# Altium PCB Controller.PcbDoc
Units mil, origin at the board's own origin, x right, y up, seen from the top; angles counter-clockwise.
Board outline 3475 x 3100 mil, 2 copper layers (Top Layer, Bottom Layer); 108 components, 78 nets, 398 pads, 30 vias.
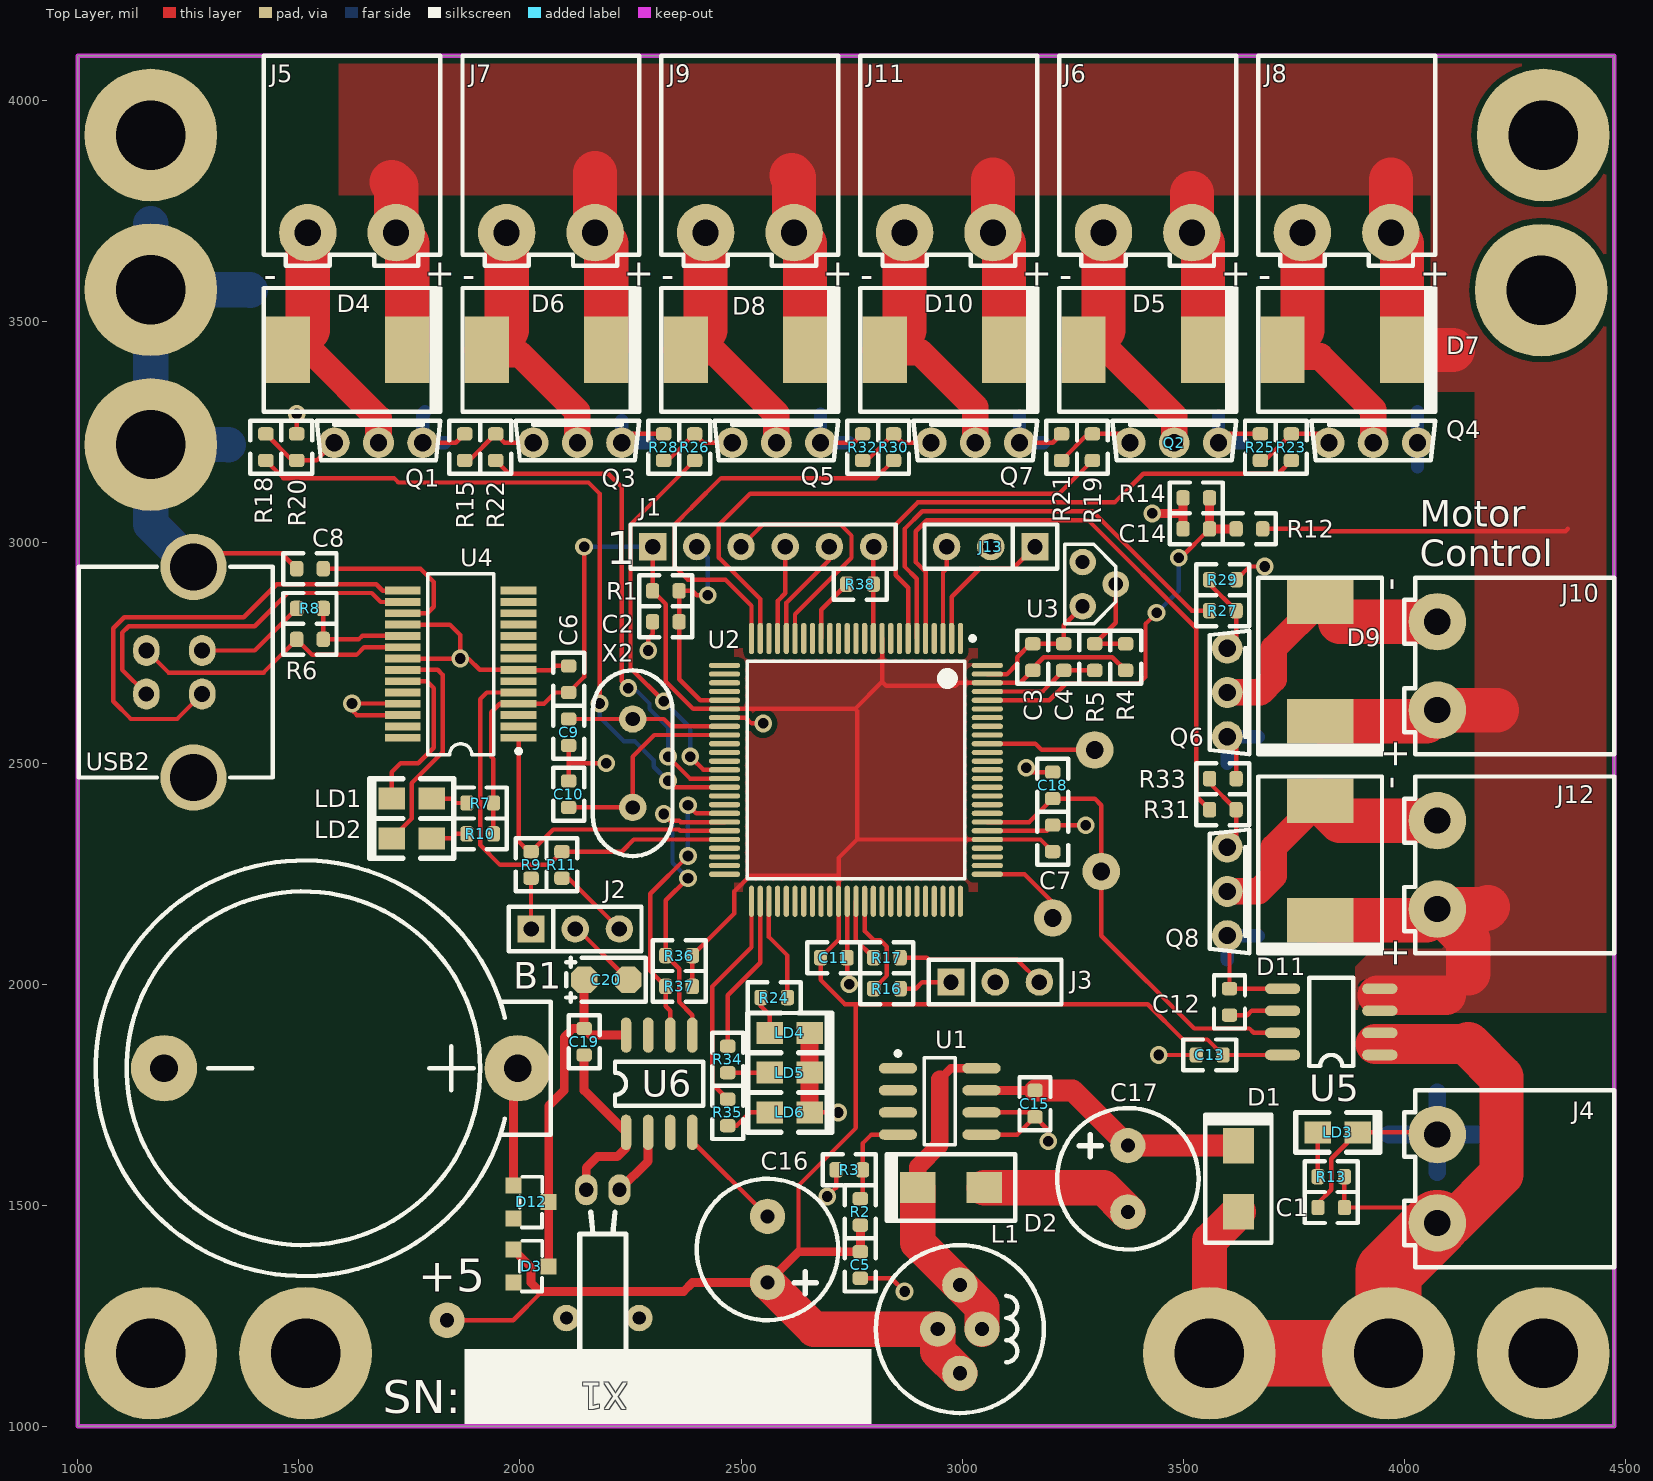
[diagram p0: Top Layer view]
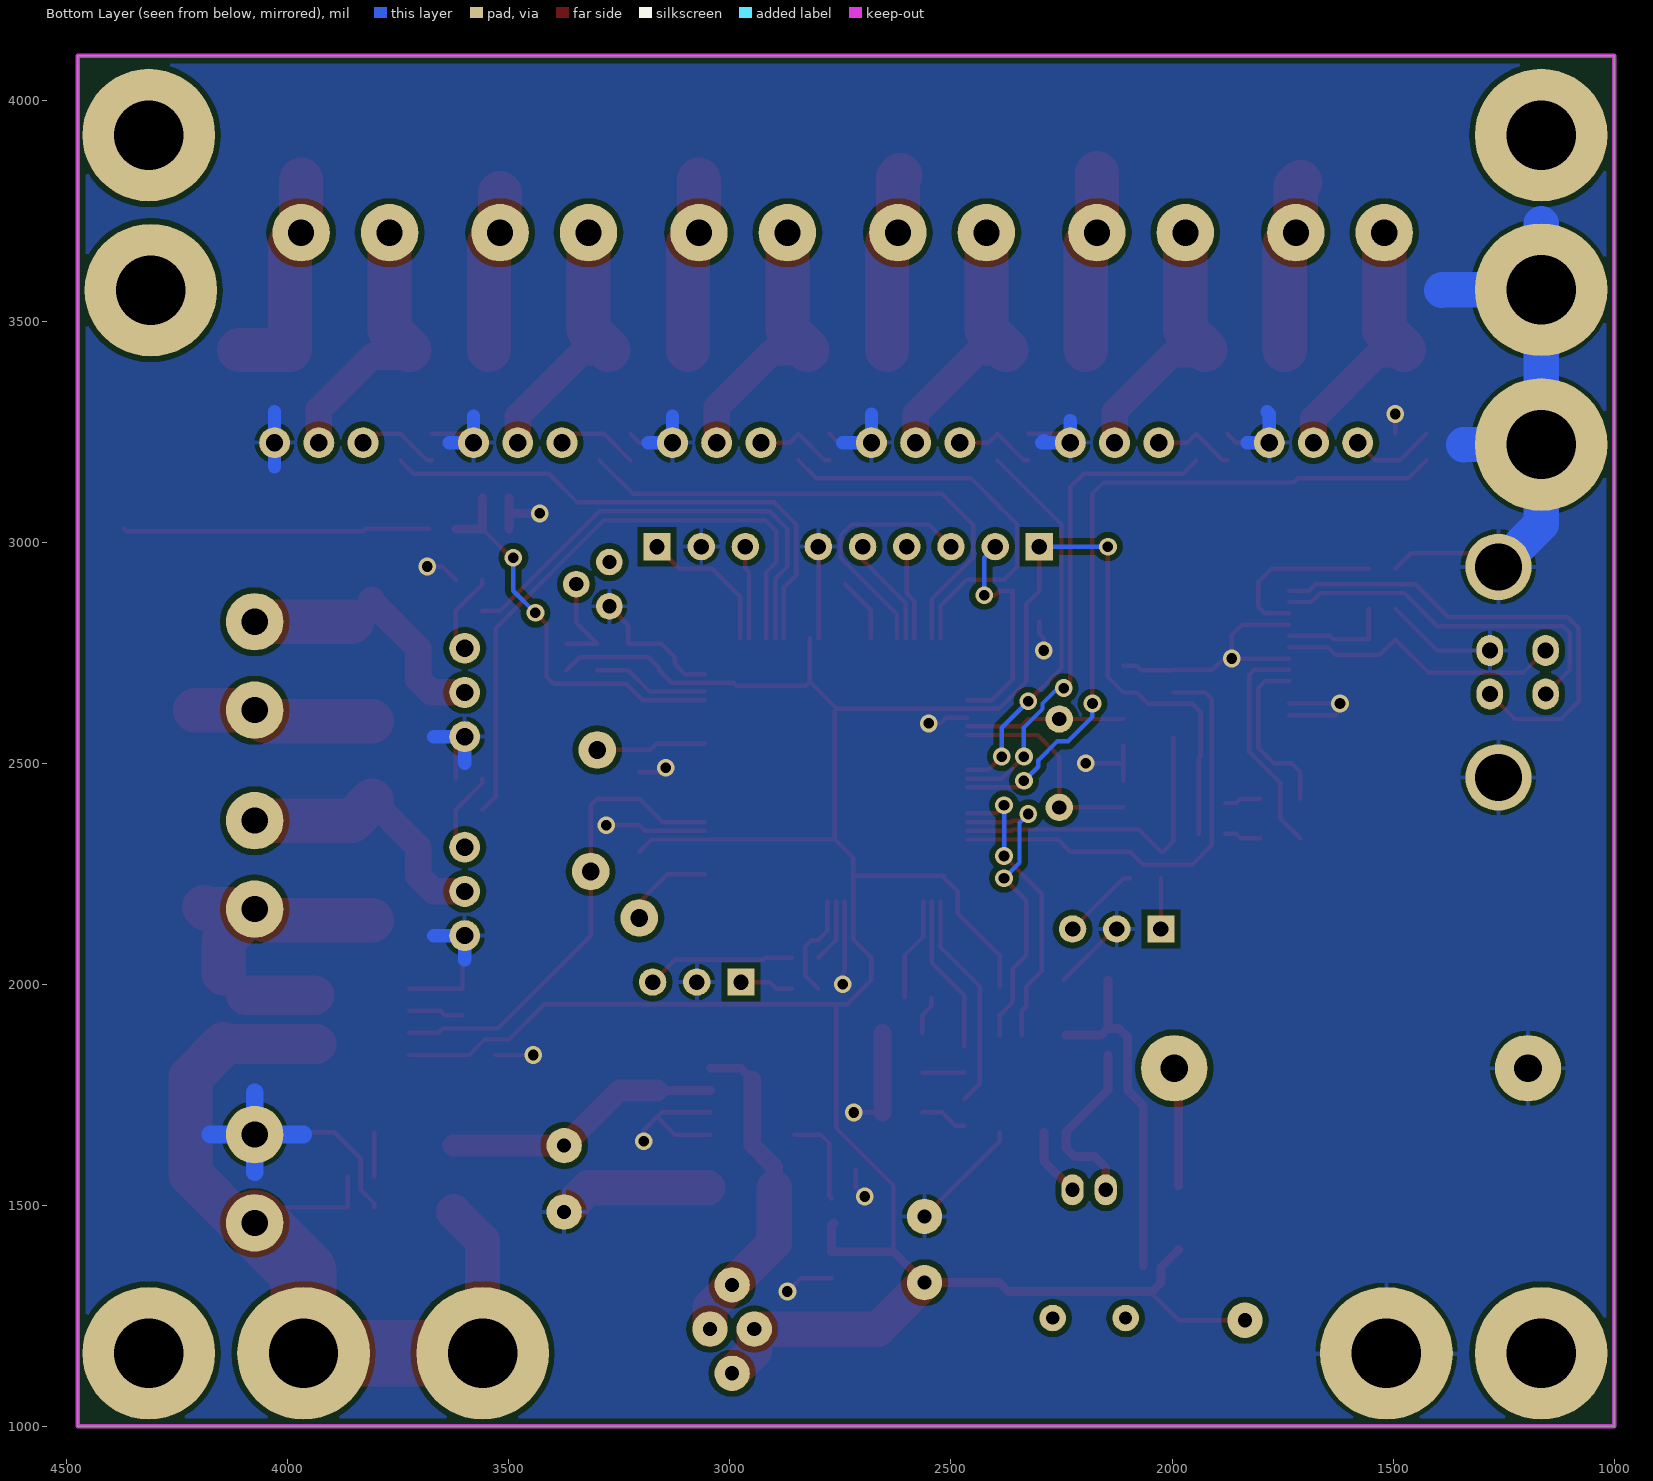
[diagram p1: Bottom Layer view, seen from below]

## Layer stack, top to bottom
Top Layer: signal copper 1.4
Dielectric: dielectric 12.6, FR-4, Dk 4.8
Bottom Layer: signal copper 1.4

## Board outline
1000,1000 1000,4100 4475,4100 4475,1000

## Design rules (kind name [scope] priority, off if disabled: settings)
Clearance Clearance_poly [InPoly] p1: gap=13
Clearance [All] p2: gap=7
ComponentClearance [All] p1 off: gap=10 collisioncheckmode=3 verticalgap=10 showdistances=FALSE
HoleSize [All] p1: absolutevalues=TRUE maxlimit=400 minlimit=24 maxpercent=80.000 minpercent=20.000
MinimumAnnularRing [All] p1: minimumring=8
PlaneClearance [All] p1: clearance=12
PolygonConnect PolygonConnect_via [IsVia] p1: connectstyle=Direct reliefconductorwidth=10 reliefentries=4 polygonreliefangle="90 Angle"
PolygonConnect [All] p2: connectstyle=Relief reliefconductorwidth=10 reliefentries=4 polygonreliefangle="90 Angle"
RoutingVias [All] p1: holewidth=24 width=40 viastyle="Through Hole" minholewidth=24 minwidth=35 maxholewidth=28 maxwidth=50
SolderMaskExpansion [All] p1: expansion=4
TestPointUsage [All] p1: valid=0 allowmultiple=FALSE
Testpoint [(IsPad And (OnTopLayer Or OnBottomLayer))] p1: side=3 testpointundercomponent=TRUE minsize=40 maxsize=100 preferedsize=60 minholesize=0 maxholesize=40 preferedholesize=32 testpointgrid=1 style=297 order=0123456789
Width [All] p1: maxlimit=300 minlimit=10 preferedwidth=10
16 further rules are at their usual default settings.

## Components (designator, comment, footprint, x,y, rotation, side; value= is the part's Value field where it differs from the comment)
B1 "CR2032 3V Lithium" COINBATT6 1995,1810 r180 top
C1 "100nF" 0603 3805,1495 r0 top
C2 "100n" 0603 2300,2820 r0 top
C3 "10n" 0603 3160,2770 r270 top
C4 "100nF" 0603 3230,2710 r90 top
C5 "100n" 0603 2770,1395 r270 top
C6 "100n" 0603 2110,2720 r270 top
C7 "10n" 0603 3205,2360 r270 top
C8 "100n" 0603 1495,2940 r0 top
C9 "22p" 0603 2110,2600 r270 top
C10 "22p" 0603 2110,2400 r90 top
C11 "100n" 0603 2740,2060 r180 top
C12 "100nF" 0603 3605,1990 r270 top
C13 "100nF" 0603 3530,1840 r0 top
C14 "100n" 0603 3500,3030 r0 top
C15 "100nF" 0603 3165,1700 r90 top
C16 "220uF 25V" RB.15/.32 2560,1325 r180 top
C17 "220u 25V" RB.15/.32 3375,1635 r0 top
C18 "100nF" 0603 3205,2480 r270 top
C19 "15p" 0603 2145,1900 r270 top
C20 "10uF 10V Tant" SMD-TANT-A 2145,2010 r0 top
D1 "SS14" DO-214AC 3625,1560 r270 top
D2 "SS14" DO-214AC 2975,1540 r0 top
D3 "BAS16" SOT-23-bat54 1985,1400 r270 top
D4 "SK54C" SMC 1610,3435 r180 top
D5 "SK54C" SMC 3410,3435 r180 top
D6 "SK54C" SMC 2060,3435 r180 top
D7 "SK54C" SMC 3860,3435 r180 top
D8 "SK54C" SMC 2510,3435 r180 top
D9 "SK54C" SMC 3810,2730 r90 top
D10 "SK54C" SMC 2960,3435 r180 top
D11 "SK54C" SMC 3810,2280 r90 top
D12 "BAS16" SOT-23-bat54 1985,1545 r270 top
J1 "Pins 6" SIP6 2300,2990 r0 top
J2 "CON3" SIP3 2025,2125 r0 top
J3 "CON3" SIP3 2975,2005 r0 top
J4 "CON2" WEID2R 4075,1460 r90 top
J5 "CON2" WEID2R 1720,3700 r180 top
J6 "CON2" WEID2R 3520,3700 r180 top
J7 "CON2" WEID2R 2170,3700 r180 top
J8 "CON2" WEID2R 3970,3700 r180 top
J9 "CON2" WEID2R 2620,3700 r180 top
J10 "CON2" WEID2R 4075,2620 r90 top
J11 "CON2" WEID2R 3070,3700 r180 top
J12 "CON2" WEID2R 4075,2170 r90 top
J13 "CON3" SIP3 3165,2990 r180 top
L1 "100uH" INDUCTOR6B 2995,1220 r0 top
LD1 "GRN" 0805DIODE 1710,2420 r0 top
LD2 "YEL" 0805DIODE 1710,2330 r0 top
LD3 "GRN" 0805DIODE 3895,1665 r180 top
LD4 "GRN" 0805DIODE 2655,1890 r180 top
LD5 "GRN" 0805DIODE 2655,1800 r180 top
LD6 "GRN" 0805DIODE 2655,1710 r180 top
Q1 "GK0F2852" TO-251 1780,3225 r0 top
Q2 "GK0F2852" TO-251 3580,3225 r0 top
Q3 "GK0F2852" TO-251 2230,3225 r0 top
Q4 "GK0F2852" TO-251 4030,3225 r0 top
Q5 "GK0F2852" TO-251 2680,3225 r0 top
Q6 "GK0F2852" TO-251 3600,2560 r270 top
Q7 "GK0F2852" TO-251 3130,3225 r0 top
Q8 "GK0F2852" TO-251 3600,2110 r270 top
R1 "100k" 0603 2360,2890 r180 top
R2 "4k7" 0603 2770,1515 r270 top
R3 "1k5" 0603 2715,1580 r0 top
R4 "1k8" 0603 3370,2710 r90 top
R5 "10k" 0603 3300,2710 r90 top
R6 "4k7" 0603 1495,2780 r0 top
R7 "330R" 0603 1940,2410 r180 top
R8 "10k" 0603 1495,2850 r0 top
R9 "1k" 0603 2025,2300 r270 top
R10 "330R" 0603 1940,2340 r180 top
R11 "1k" 0603 2095,2300 r270 top
R12 "3k" 0603 3620,3030 r0 top
R13 "2k7" 0603 3865,1565 r180 top
R14 "1k" 0603 3500,3100 r0 top
R15 "10k" 0603 1875,3185 r90 top
R16 "1k" 0603 2800,1990 r0 top
R17 "1k" 0603 2800,2060 r0 top
R18 "1k" 0603 1425,3185 r90 top
R19 "1k" 0603 3295,3185 r90 top
R20 "10k" 0603 1495,3185 r90 top
R21 "10k" 0603 3225,3185 r90 top
R22 "1k" 0603 1945,3185 r90 top
R23 "1k" 0603 3745,3185 r90 top
R24 "680R" 0603 2605,1970 r180 top
R25 "10k" 0603 3675,3185 r90 top
R26 "1k" 0603 2395,3185 r90 top
R27 "1k" 0603 3560,2845 r0 top
R28 "10k" 0603 2325,3185 r90 top
R29 "10k" 0603 3560,2915 r0 top
R30 "1k" 0603 2845,3185 r90 top
R31 "1k" 0603 3560,2395 r0 top
R32 "10k" 0603 2775,3185 r90 top
R33 "10k" 0603 3560,2465 r0 top
R34 "680R" 0603 2470,1860 r270 top
R35 "680R" 0603 2470,1740 r270 top
R36 "4k7" 0603 2330,2065 r0 top
R37 "4k7" 0603 2330,1995 r0 top
R38 "0R" 0603 2799.37,2905 r180 top
U1 "LM2594M-ADJ" M08A_N 2855,1810 r0 top
U2 "ATMEGA2560-16AU" 100T1_N 2760,2485 r270 top
U3 "LM335Z" TO-92_LM335 3272.71,2855 r90 top
U4 "FT232R" ssop28 1865.91,2723.98 r90 top
U5 "Current Sensor" so-8 3945,1840 r180 top
U6 "PCF8563" so-8 2240,1665 r90 top
USB2 "USB-B" USB_BV 1155,2755 r90 top
X1 "32768Hz" XTAL32K 2225,1535 r180 top
X2 "14.7456MHz" XTAL-V2 2255,2400 r90 top

## Footprints (in the part's own frame and the unit in brackets; to place one, negate y for a bottom-side part, rotate by r counter-clockwise, add the part's x,y. Pads: shape width x height; smd on the part's side, far side on the other; paste and mask are expansions set on the pad)
100T1_N [mm] "100-Pin Thin Quad Flat Pack 0.5 mm Pitch, IPC Medium Density"
  oval 1.8x0.3 smd: 1(-7.55,6) 2(-7.55,5.5) 3(-7.55,5) 4(-7.55,4.5) 5(-7.55,4) 6(-7.55,3.5) 7(-7.55,3) 8(-7.55,2.5) 9(-7.55,2) 10(-7.55,1.5) 11(-7.55,1) 12(-7.55,0.5) 13(-7.55,0) 14(-7.55,-0.5) 15(-7.55,-1) 16(-7.55,-1.5) 17(-7.55,-2) 18(-7.55,-2.5) 19(-7.55,-3) 20(-7.55,-3.5) 21(-7.55,-4) 22(-7.55,-4.5) 23(-7.55,-5) 24(-7.55,-5.5) 25(-7.55,-6) 51(7.55,-6) 52(7.55,-5.5) 53(7.55,-5) 54(7.55,-4.5) 55(7.55,-4) 56(7.55,-3.5) 57(7.55,-3) 58(7.55,-2.5) 59(7.55,-2) 60(7.55,-1.5) 61(7.55,-1) 62(7.55,-0.5) 63(7.55,0) 64(7.55,0.5) 65(7.55,1) 66(7.55,1.5) 67(7.55,2) 68(7.55,2.5) 69(7.55,3) 70(7.55,3.5) 71(7.55,4) 72(7.55,4.5) 73(7.55,5) 74(7.55,5.5) 75(7.55,6)
  oval 0.3x1.8 smd: 26(-6,-7.55) 27(-5.5,-7.55) 28(-5,-7.55) 29(-4.5,-7.55) 30(-4,-7.55) 31(-3.5,-7.55) 32(-3,-7.55) 33(-2.5,-7.55) 34(-2,-7.55) 35(-1.5,-7.55) 36(-1,-7.55) 37(-0.5,-7.55) 38(0,-7.55) 39(0.5,-7.55) 40(1,-7.55) 41(1.5,-7.55) 42(2,-7.55) 43(2.5,-7.55) 44(3,-7.55) 45(3.5,-7.55) 46(4,-7.55) 47(4.5,-7.55) 48(5,-7.55) 49(5.5,-7.55) 50(6,-7.55) 76(6,7.55) 77(5.5,7.55) 78(5,7.55) 79(4.5,7.55) 80(4,7.55) 81(3.5,7.55) 82(3,7.55) 83(2.5,7.55) 84(2,7.55) 85(1.5,7.55) 86(1,7.55) 87(0.5,7.55) 88(0,7.55) 89(-0.5,7.55) 90(-1,7.55) 91(-1.5,7.55) 92(-2,7.55) 93(-2.5,7.55) 94(-3,7.55) 95(-3.5,7.55) 96(-4,7.55) 97(-4.5,7.55) 98(-5,7.55) 99(-5.5,7.55) 100(-6,7.55)
  silkscreen extent -7.67,-6.25 6.25,6.83, body extent -7,-7 7,7, height 1.05
0603 [mil]
  rrect50% 30x35 smd: 1(0,0) 2(60,0)
  silkscreen extent -30,-35 90,35
0805DIODE [mil]
  rect 60x50 smd: A(90,0) K(0,0)
  silkscreen extent -50,-45 140,45
COINBATT6 [mil]
  round 150 hole 63: +(0,0) -(800,0)
  silkscreen extent -75,-470 955,470
DO-214AC [mil]
  rect 80x70 smd: A(75,0) K(-75,0)
  silkscreen extent -145,-75 145,75
INDUCTOR6B [mil] "380mil dia"
  round 80 hole 32: 1(0,100) 1(50,0) 2(-50,0) 2(0,-100)
  silkscreen extent -190,-190 190,190
M08A_N [mm]
  oval 2.2x0.6 smd: 1(0,0) 2(0,-1.27) 3(0,-2.54) 4(0,-3.81) 5(4.8,-3.81) 6(4.8,-2.54) 7(4.8,-1.27) 8(4.8,0)
  silkscreen extent -0.12,-4.41 3.3,0.97, body extent 0.45,-4.36 4.35,0.54, height 1.76
RB.15/.32 [mil]
  round 80 hole 32: 1(0,0) 2(0,-150)
  silkscreen extent -160,-235 160,85
SIP3 [mil]
  rect 62x62 hole 35: 1(0,0)
  round 62 hole 35: 2(100,0) 3(200,0)
  silkscreen extent -50,-50 250,50
SIP6 [mil]
  rect 62x62 hole 35: 1(0,0)
  round 62 hole 35: 2(100,0) 3(200,0) 4(300,0) 5(400,0) 6(500,0)
  silkscreen extent -50,-50 550,50
SMC [mil]
  rect 100x150 smd: A(135,0) K(-135,0)
  silkscreen extent -210,-140 190,140
SMD-TANT-A [mil]
  oct 60x60 smd: 1(0,0) 2(100,0)
  silkscreen extent -40,-50 140,50
so-8 [mil]
  oval 80x24 smd: 1(0,0) 2(0,-50) 3(0,-100) 4(0,-150) 5(220,-150) 6(220,-100) 7(220,-50) 8(220,0)
  silkscreen extent 60,-175 160,25
SOT-23-bat54 [mil]
  rect 36x36 smd: A(0,0) K(38,80) NC(75,0)
  silkscreen extent -20,15 95,65
ssop28 [mm] "SSOP; 28 Leads; Body Width 5.3 mm; Pitch 0.65 mm"
  rect 0.45x2.05 smd: 1(-4.225,-3.325) 2(-3.575,-3.325) 3(-2.925,-3.325) 4(-2.275,-3.325) 5(-1.625,-3.325) 6(-0.975,-3.325) 7(-0.325,-3.325) 8(0.325,-3.325) 9(0.975,-3.325) 10(1.625,-3.325) 11(2.275,-3.325) 12(2.925,-3.325) 13(3.575,-3.325) 14(4.225,-3.325) 15(4.225,3.325) 16(3.575,3.325) 17(2.925,3.325) 18(2.275,3.325) 19(1.625,3.325) 20(0.975,3.325) 21(0.325,3.325) 22(-0.325,3.325) 23(-0.975,3.325) 24(-1.625,3.325) 25(-2.275,3.325) 26(-2.925,3.325) 27(-3.575,3.325) 28(-4.225,3.325)
  silkscreen extent -5.2,-3.45 5.2,1.9
TO-92_LM335 [mil]
  round 60 hole 32: +(50,-75) -(0,0) ADJ(100,0)
  silkscreen extent -40,-75 140,40
TO-251 [mil]
  round 70 hole 39: D(-100,0) G(-200,0) S(0,0)
  silkscreen extent -240,-40 40,50
USB_BV [mm] "USB Type B vertical"
  round 3.81 hole 2.71: 0(-7.3,-2.71) 0(4.8,-2.71)
  oval 1.778x1.524 hole 0.92: 1(0,0) 3(-2.5,-3.2) 4(0,-3.2)
  oval 1.778x1.524 hole 0.889: 2(-2.5,0)
  silkscreen extent -7.3,-7.26 4.82,3.89
WEID2R [mil]
  round 130 hole 59: 1(0,0) 2(200,0)
  silkscreen extent -100,-400 300,75
XTAL32K [mil]
  oval 50x70 hole 32: 1(0,0) 2(75,0)
  silkscreen extent -15,50 90,400
XTAL-V2 [mil]
  round 62 hole 32: 1(0,0) 2(200,0)
  silkscreen extent -110,-90 310,90

## Part data
B1: library part BATTERY
C1 C3 C4 C6 C7 C8 C9 C10 C11 C12 C13 C14 C15 C18 C19: library part CAP
C2 C5: library part cap
C16 C17 C20: library part "CAPACITOR POL-S"
D1 D2: library part "DIODE SCHOTTKY-S"
D3 D12: library part DIODE
D4 D5 D6 D7 D8 D9 D10 D11: library part "DIODE SCHOTTKY"
J1: library part CON6
L1: library part INDUCTOR6
LD1 LD2 LD3 LD4 LD5 LD6: library part LED
Q1 Q2 Q3 Q4 Q5 Q6 Q7 Q8: library part MOSFET-N1DSML
R1 R9 R11 R16 R17: library part res8
R2 R3: library part RES-AX0.3
R4 R5 R6 R7 R8 R10 R12 R13 R14 R15 R18 R19 R20 R21 R22 R23 R24 R25 R26 R27 R28 R29 R30 R31 R32 R33 R34 R35 R36 R37 R38: library part RES8
U1: library part LM2594
U2: library part ATMEGA2560(TQFP100)
U5: library part ACS754
X1 X2: library part CRYSTAL

## Free pads (board coordinates)
  round 60 hole 30: 0(2105,1245) 0(2270,1245)
  round 85 hole 40: 0(3300,2530) 1(3205,2150) 1(3315,2255)
  round 80 hole 32: 2(1835,1240)
  round 300 hole 157 paste+0: ""(1165,1165) ""(1165,3220.91) ""(1165,3570.91) ""(1165,3920.91) ""(1515,1165) ""(3559.61,1165) ""(3964.61,1165) ""(4310,3570) ""(4314.61,1165) ""(4314.61,3920.91)

## Via types
v1: diameter 40, hole 24, Top Layer to Bottom Layer, tented both sides, 30 vias

## Nets (pads, with @x,y where several pads share a name; then routed paths per layer and width w, separated by ;. In a path a pad name is that pad's centre, name@x,y a point inside that pad or via, vN(x,y) a via of type N, cw(c..) or ccw(c..) an arc to the next point about the centre after c; other vN are vias at no path point)
12V: C1.2 D1.A J4.1 pad.@3559.61,1165 pad.@3964.61,1165 R13.1 U5.1 U5.2 | length 2113.9
  Top Layer w10: R13.1 C1.2 4040,1495 J4.1
  Top Layer w80: pad.@3559.61,1165 3559.61,1419.61 D1.A ; J4.1 J4.1@4110,1460
  Top Layer w90: 3935,1865 4145,1865
  Top Layer w100: J4.1@4110,1460 4220,1570 4220,1790 4145,1865
  Top Layer w150: pad.@3559.61,1165 3964.61,1165 3964.61,1349.61 J4.1
12V_MOTOR: D4.K D5.K D6.K D7.K D8.K D9.K D10.K D11.K J5.1 J6.1 J7.1 J8.1 J9.1 J10.1 J11.1 J12.1 R12.2 U5.3 U5.4 | length 4309.3
  Top Layer w10: R12.2 3825,3030 3830,3025 4365,3025 4370,3030
  Top Layer w90: 3940,1975 4095,1975
  Top Layer w100: 1710,3815 1720,3805 J5.1 1745,3675 D4.K ; 2170,3835 J7.1 2195,3675 D6.K ; 2615,3830 2620,3825 J9.1 2645,3675 D8.K ; 3070,3820 J11.1 3095,3675 D10.K ; 3520,3790 J6.1 3545,3675 D5.K ; D11.K 4050,2145 J12.1 ; D9.K 4050,2595 J10.1 4210,2620 ; 3970,3820 J8.1 3995,3675 D7.K 4110,3435 ; 4145,2025 4145,2100 J12.1 ; 4190,2175 4185,2170 J12.1
12V_OUT_MON: C14.2 R12.1 R14.2 U2.96 | length 907.5
  Top Layer w10: U2.96 3197.48,2642.48 3235,2680 3400,2680 3415,2695 3415,2815 v1(3440,2840) ; v1(3490,2965) 3495,2965 C14.2
  Top Layer w20: R14.2 C14.2 R12.1
  Bottom Layer w10: v1(3440,2840) 3490,2890 v1(3490,2965)
+5: C3.2 C5.1 C6.2 C7.2 C11.2 C13.2 C16.1 D3.A J1.1 L1.2 pad.2 R1.2 R2.2 R4.1 R7.1 R10.1 R36.2 R37.2 U2.10 U2.31 U2.61 U2.80 U2.98 U2.100 U4.4 U5.8 | length 7604.9
  Top Layer w10: pad.2 1985,1240 2050,1305 ; R10.1 R7.1 1940,2510 1935,2515 1935,2615 1954.41,2634.41 U4.4 2054.41,2634.41 2080,2660 C6.2 2145,2695 2145,2730 v1(2145,2990) ; J1.1 R1.2 2330,2860 2330,2685 2392.2,2622.8 U2.31 2757.8,2622.8 ; R37.2 R36.2 2485,2160 2485,2210 2520,2245 ; 2515,2245 2520,2245 ; 2630,1395 2630,1545 2760,1675 2760,1955 ; U2.10 2819.06,2684.06 ; C7.2 3177.48,2327.52 U2.80 2762.52,2327.52 ; R4.1 3340,2740 3185,2740 3160,2715 C3.2 3131.85,2681.85 U2.98 2991.85,2681.85 2985,2675 2828.11,2675 2819.06,2684.06 ; U5.8 C13.2 3555,1875 3500,1875 3420,1955 2760,1955 ; 2520,2245 2720.63,2245 ; 2720.63,2245 2720.63,2285.63 2762.52,2327.52 ; 2720.63,2245 U2.61 2720.63,2100.63 C11.2 2680,2010 2735,1955 2760,1955 ; 2757.8,2622.8 2762.52,2618.07 2762.52,2327.52 ; 2757.8,2622.8 2819.06,2684.06
  Top Layer w20: D3.A 2025,1360 2025,1325 2045,1305 2050,1305 2370,1305 2390,1325 C16.1 2630,1395 C5.1 R2.2 R2.2@2765,1460
  Top Layer w80: C16.1 2665,1220 2945,1220 2945,1170 L1.2@2995,1120
  Bottom Layer w10: v1(2145,2990) J1.1
+VBB: C19.1 C20.1 D3.K D12.K U6.8 | length 792
  Top Layer w20: D3.K D12.K 2065,1725 2100,1760 2100,1880 2120,1900 C19.1@2140,1900 ; C20.1 C19.1 2160,1885 U6.8
BOARD_ID: R38.2 U2.17 | length 146.8
  Top Layer w10: U2.17 2681.26,2846.89 R38.2
CS0: U2.19
GND: B1.- C1.1 C2.1 C3.1 C4.2 C5.2 C6.1 C7.1 C8.1 C9.2 C10.2 C11.1 C12.1 C13.1 C14.1 C15.1 C16.2 C17.2 C18.1 C20.2 D2.A J1.6 J2.2 J3.2 J4.2 J13.2 LD3.K LD4.K LD5.K LD6.K pad.@1165,3220.91 pad.@1165,3570.91 pad.@1515,1165 Q1.S Q2.S Q3.S Q4.S Q5.S Q6.S Q7.S Q8.S R3.1 R8.1 R14.1 R15.2 R20.2 R21.2 R25.2 R28.2 R29.2 R32.2 R33.2 R38.1 U1.5 U1.6 U2.11 U2.32 U2.62 U2.81 U2.99 U3.- U4.7 U4.18 U4.21 U4.25 U4.26 U5.5 U6.4 USB2.0 USB2.4 | length 8412.9
  Top Layer w10: USB2.0@1261.69,2943.98 1292.72,2975 1460,2975 C8.1 ; USB2.4 1400,2755 R8.1 ; R20.2 v1(1495,3290) ; U4.26 1631.18,2608.82 1620,2620 v1(1620,2635) 1734.41,2635 U4.25 ; U4.21 v1(1865,2736.77) ; U4.18 1841.46,2813.54 1865,2790 v1(1865,2736.77) ; Q1.S 1855,3225 R15.2 ; C10.2 2110,2500 ; C9.2 2110,2500 ; C6.1 2080,2720 2070,2710 1997.99,2710 U4.7 1908.82,2711.18 1883.23,2736.77 v1(1865,2736.77) ; J2.2 2130,2125 C20.2 ; v1(2195,2500) 2110,2500 ; Q3.S 2250,3245 R28.2 ; v1(2290,2755) 2290,2782.5 2300,2792.5 C2.1 ; U6.4 2390,1645 C16.2 ; U2.32 2510.83,2603.11 2523.94,2590 v1(2550,2590) ; LD6.K v1(2720,1710) ; Q5.S 2755,3225 R32.2 ; v1(2695,1520) 2715,1540 R3.1 ; U2.62 2740,2187.44 C11.1 2740,2030 2745,2025 v1(2745,2000) ; C5.2 2840,1335 v1(2870,1305) ; U2.11 2799.37,2989.37 J1.6 ; U1.5 3125,1660 C15.1 ; U1.6 3155,1710 C15.1 ; U2.81 3192.2,2347.2 C7.1 v1(3280,2360) ; U2.99 3101.54,2701.54 3125,2725 3125,2740 3155,2770 C3.1 C4.2 3230,2812.29 U3.- ; Q7.S 3205,3225 R21.2 ; v1@3140,2490 v1(3145,2490) 3155,2480 C18.1 ; v1(3195,1645) 3195,1670 C15.1 ; v1(3445,1840) C13.1 ; Q2.S 3600,3245 R25.2 ; Q8.S 3605,2105 C12.1 U5.5 ; Q6.S 3620,2540 R33.2 ; R29.2 3650,2945 v1(3685,2945) ; C1.1 3805,1505 3835,1535 3835,1605 LD3.K 4070,1665 J4.2
  Top Layer w20: v1(3430,3065) 3500,3065 ; C14.1 3500,3065 ; R14.1 3500,3065
  Top Layer w40: LD6.K LD5.K LD4.K
  Top Layer w80: D2.A 3320,1540 C17.2
  Bottom Layer w10: 2230,3275 2230,3285
  Bottom Layer w30: 1785,3295 1780,3290 Q1.S 1830,3225 ; 2230,3275 Q3.S 2295,3225 2290,3230 ; 2680,3290 Q5.S 2745,3225 ; 3130,3285 Q7.S 3185,3225 ; 3580,3285 Q2.S 3635,3225 ; 3600,2055 Q8.S 3670,2110 ; 3600,2500 Q6.S 3670,2560 ; 4030,3170 Q4.S 4030,3295
  Bottom Layer w40: 3965,1660 J4.2 ; 4075,1575 J4.2 ; 4075,1755 J4.2 ; 4175,1660 J4.2
  Bottom Layer w80: pad.@1165,3720 pad.@1165,3570.91 ; USB2.0@1261.69,2943.98 1165,3040.67 pad.@1165,3220.91 ; 1340,3220 1339.09,3220.91 pad.@1165,3220.91 ; 1390,3570 1389.09,3570.91 pad.@1165,3570.91 ; pad.@1165,3220.91 pad.@1165,3570.91
MISO: J1.4 U2.22 | length 214.9
  Top Layer w10: U2.22 2582.83,2867.17 2600,2884.33 J1.4
MOSI: J1.5 U2.21 | length 248.1
  Top Layer w10: U2.21 2602.52,2862.52 2700,2960 J1.5
MOTORCURRENT: C18.2 pad.1@3315,2255 U2.82 U5.7 | length 1082.1
  Top Layer w10: U2.82 3151.89,2366.89 C18.2 3300,2420 3315,2405 3315,2255 3315,2110 3525,1900 3650,1900 3660,1890 U5.7
NetB1_+: B1.+ D12.A | length 269.1
  Top Layer w20: D12.A 1985,1800 B1.+
NetC8_2: C8.2 U4.17 | length 394.6
  Top Layer w10: C8.2 1775,2940 1805,2910 1805,2853.9 1790.24,2839.13 U4.17
NetC9_1: C9.1 U2.33 X2.2 | length 359.6
  Top Layer w10: C9.1 X2.2 2325,2600 2341.57,2583.43 U2.33
NetC10_1: C10.1 U2.34 X2.1 | length 487.9
  Top Layer w10: C10.1 X2.1 2255,2515 2303.74,2563.74 U2.34
NetC12_2: C12.2 U5.6 | length 124.1
  Top Layer w10: C12.2 3645,1930 3655,1940 U5.6
NetC15_2: C15.2 C17.1 D1.K U1.7 | length 632.8
  Top Layer w20: U1.7 C15.2
  Top Layer w50: C15.2 3250,1760 C17.1 D1.K
NetC19_2: C19.2 U6.1 X1.2 | length 408
  Top Layer w20: C19.2 2145,1760 U6.1 2240,1630 2220,1610 2175,1610 2150,1585 X1.2
NetD2_K: D2.K L1.1 U1.8 | length 750.1
  Top Layer w20: 2949.91,1784.91 2975,1810 U1.8
  Top Layer w40: D2.K 2900,1586.66 2949.91,1636.57 2949.91,1784.91
  Top Layer w80: D2.K 2900,1415 2995,1320 3045,1270 L1.1@3045,1220
NetD4_A: D4.A J5.2 Q1.D | length 622.8
  Top Layer w60: D4.A@1475,3425 D4.A@1485,3425 ; D4.A D4.A@1485,3425 ; D4.A@1485,3425 1535,3425 1680,3280 Q1.D@1680,3230 ; Q1.D@1680,3230 Q1.D Q1.D@1680,3230
  Top Layer w100: D4.A 1520,3480 J5.2
NetD5_A: D5.A J6.2 Q2.D | length 620.8
  Top Layer w60: D5.A@3275,3430 D5.A@3280,3430 ; D5.A D5.A@3280,3430 ; D5.A@3280,3430 3335,3430 3480,3285 Q2.D@3480,3230 ; Q2.D@3480,3230 Q2.D Q2.D@3480,3230
  Top Layer w100: D5.A 3320,3480 J6.2
NetD6_A: D6.A J7.2 Q3.D | length 631.6
  Top Layer w60: D6.A@1925,3425 D6.A@1935,3425 ; D6.A D6.A@1935,3425 ; D6.A@1935,3425 2000,3425 2130,3295 Q3.D@2130,3230 ; Q3.D@2130,3230 Q3.D Q3.D@2130,3230
  Top Layer w100: D6.A 1970,3480 J7.2
NetD7_A: D7.A J8.2 Q4.D | length 639.6
  Top Layer w60: D7.A@3725,3420 D7.A@3740,3420 ; D7.A D7.A@3740,3420 ; D7.A@3740,3420 3810,3420 3930,3300 Q4.D@3930,3230 ; Q4.D@3930,3230 Q4.D Q4.D@3930,3230
  Top Layer w100: D7.A 3770,3480 J8.2
NetD8_A: D8.A J9.2 Q5.D | length 623.7
  Top Layer w60: D8.A@2375,3430 D8.A@2380,3430 ; D8.A D8.A@2380,3430 ; D8.A@2380,3430 2440,3430 2580,3290 Q5.D@2580,3230 ; Q5.D@2580,3230 Q5.D Q5.D@2580,3230
  Top Layer w100: D8.A 2420,3480 J9.2
NetD9_A: D9.A J10.2 Q6.D | length 565.9
  Top Layer w60: D9.A@3810,2870 D9.A 3705,2760 3705,2690 3675,2660 Q6.D@3605,2660 ; Q6.D@3605,2660 Q6.D Q6.D@3605,2660
  Top Layer w100: D9.A@3855,2820 J10.2
NetD10_A: D10.A J11.2 Q7.D | length 627.5
  Top Layer w60: D10.A@2825,3425 2830,3430 2905,3430 3030,3305 Q7.D@3030,3230 ; Q7.D@3030,3230 Q7.D Q7.D@3030,3230
  Top Layer w100: D10.A 2870,3480 J11.2
NetD11_A: D11.A J12.2 Q8.D | length 621.6
  Top Layer w60: D11.A 3705,2310 3705,2245 3670,2210 Q8.D@3605,2210 ; Q8.D@3605,2210 Q8.D Q8.D@3605,2210
  Top Layer w100: D11.A 3855,2370 J12.2
NetJ2_1: J2.1 R9.2 | length 115
  Top Layer w10: J2.1 R9.2
NetJ2_3: J2.3 R11.2 | length 177.6
  Top Layer w10: R11.2 2110,2240 J2.3
NetJ3_1: J3.1 R16.2 | length 121.2
  Top Layer w10: R16.2 2895,1990 2910,2005 J3.1
NetJ3_3: J3.3 R17.2 | length 337.8
  Top Layer w10: R17.2 2920,2060 2925,2055 3125,2055 J3.3
NetLD1_A: LD1.A R7.2 | length 84.1
  Top Layer w10: LD1.A 1845,2420 1855,2410 R7.2
NetLD2_A: LD2.A R10.2 | length 84.1
  Top Layer w10: LD2.A 1845,2330 1855,2340 R10.2
NetLD3_A: LD3.A R13.2 | length 100
  Top Layer w10: R13.2 LD3.A
NetLD4_A: LD4.A R24.2 | length 88.3
  Top Layer w10: R24.2 2545,1950 2565,1930 LD4.A
NetLD5_A: LD5.A R34.2 | length 95
  Top Layer w10: R34.2 LD5.A
NetLD6_A: LD6.A R35.2 | length 107.4
  Top Layer w10: R35.2 2490,1680 2520,1710 LD6.A
NetQ1_G: Q1.G R18.2 R20.1 | length 196.4
  Top Layer w10: R18.2 1485,3185 R20.1 1540,3185 Q1.G
NetQ2_G: Q2.G R19.2 R21.1 | length 188.1
  Top Layer w10: R21.1 3285,3245 R19.2 3360,3245 Q2.G
NetQ3_G: Q3.G R15.1 R22.2 | length 188.1
  Top Layer w10: R15.1 1885,3185 R22.2 1965,3225 Q3.G
NetQ4_G: Q4.G R23.2 R25.1 | length 188.1
  Top Layer w10: R25.1 3685,3185 R23.2 3810,3245 Q4.G
NetQ5_G: Q5.G R26.2 R28.1 | length 188.1
  Top Layer w10: R28.1 2335,3185 R26.2 2415,3225 Q5.G
NetQ6_G: Q6.G R27.2 R29.1 | length 188.1
  Top Layer w10: R29.1 3560,2905 R27.2 3620,2780 Q6.G
NetQ7_G: Q7.G R30.2 R32.1 | length 188.1
  Top Layer w10: R32.1 2785,3185 R30.2 2865,3225 Q7.G
NetQ8_G: Q8.G R31.2 R33.1 | length 188.1
  Top Layer w10: R33.1 3560,2455 R31.2 3620,2330 Q8.G
NetR2_1: R2.1 R3.2 U1.4 | length 215.4
  Top Layer w10: R2.1 2775,1520 R3.2 2775,1640 2795,1660 U1.4
NetR4_2: R4.2 R5.2 U3.+ | length 224.8
  Top Layer w10: U3.+ 3347.71,2817.71 R5.2 R4.2
NetR6_2: R6.2 R8.2 U4.19 | length 253.3
  Top Layer w10: R8.2 R6.2 1635,2780 1642.95,2787.95 U4.19
NetR24_1: R24.1 U2.53 | length 235.1
  Top Layer w10: U2.53 2563.15,2106.85 2605,2065 R24.1
NetR34_1: R34.1 U2.52 | length 358.2
  Top Layer w10: R34.1 2470,1975 2543.46,2048.46 U2.52
NetR35_1: R35.1 U2.51 | length 499
  Top Layer w10: R35.1 2435,1775 2435,1995 2523.78,2083.78 U2.51
NetU6_2: U6.2 X1.1 | length 156.9
  Top Layer w20: X1.1 2290,1600 U6.2
PWM_1: R18.1 U2.40 | length 1648.2
  Top Layer w10: R18.1 1465,3145 1715,3145 1725,3135 2155,3135 2180,3110 v1(2180,2635) ; v1(2335,2460) 2349.37,2445.63 U2.40
  Bottom Layer w10: v1(2180,2635) 2180,2605 2235,2550 2259.23,2550 2302.85,2506.39 2302.85,2492.15 v1(2335,2460)
PWM_2: R22.1 U2.39 | length 1119.3
  Top Layer w10: R22.1 1975,3155 2200,3155 2230,3125 2230,2685 v1(2245,2670) ; v1(2335,2515) 2384.68,2465.32 U2.39
  Bottom Layer w10: v1(2245,2670) 2258,2670 2293,2635 2293,2622.81 2335,2580.81 v1(2335,2515)
PWM_3: R26.1 U2.38 | length 869.1
  Top Layer w10: v1(2325,2640) 2250,2715 2250,3040 R26.1 ; v1@2390,2510 2415,2485 U2.38
  Bottom Layer w10: v1(2325,2640) 2385,2580 v1(2385,2515)
PWM_4: R30.1 U2.25 | length 938.7
  Top Layer w10: U2.25 2523.78,2856.22 2465,2915 2380,2915 2350,2945 2350,3040 2387.07,3077.07 ; R30.1 2805,3145 2455,3145 2390,3080 ; 2387.07,3077.07 2390,3080 ; 2387.07,3077.07 2390,3080
PWM_5: R19.1 U2.24 | length 1201.4
  Top Layer w10: 2450.31,3040.31 2450,3040 2450,2965 2543.46,2871.54 U2.24 ; 2450.61,3040 2520.61,3110 3220,3110 R19.1
PWM_6: R23.1 U2.7 | length 1229.5
  Top Layer w10: U2.7 2878.11,2896.89 2850,2925 2850,3040 2900,3090 2985,3090 ; R23.1 3715,3155 3410,3155 3345,3090 2990,3090 ; 2985,3090 2990,3090 ; 2985,3090 2990,3090
PWM_7: R27.1 U2.6 | length 1059
  Top Layer w10: U2.6 2897.8,2917.2 2870,2945 2870,3030 2910,3070 3295,3070 3520,2845 R27.1
PWM_8: R31.1 U2.5 | length 1421.3
  Top Layer w10: U2.5 2917.48,2932.52 2895,2955 2895,3025 2920,3050 3285,3050 3530,2805 3530,2425 R31.1
RESET*: C2.2 J1.2 R1.1 U2.30 | length 511.9
  Top Layer w10: v1(2425,2880) 2400,2880 2390,2890 R1.1 C2.2 2360,2690 2407.52,2642.48 U2.30
  Bottom Layer w10: J1.2 2425,2965 v1(2425,2880)
RXD0: J13.1 U2.2 | length 329.8
  Top Layer w10: U2.2 2976.54,2876.54 3040,2940 3115,2940 J13.1
RXD_EXP: R17.1 U2.63 | length 144.3
  Top Layer w10: U2.63 2760,2100 R17.1
RXD_LED: LD2.K U4.22 | length 512.3
  Top Layer w10: LD2.K 1755,2375 1755,2455 1825,2525 1825,2700 1813.82,2711.18 U4.22
RXD_USB: R9.1 U2.45 U4.1 | length 731.9
  Top Layer w10: U4.1 1996.81,2323.19 2020,2300 R9.1 2075,2350 2360,2350 2362.8,2347.2 U2.45
SCK: J1.3 U2.20 | length 566.8
  Top Layer w10: J1.3 2550,3040 2725,3040 2750,3015 2750,2965 2622.2,2837.2 U2.20
SCL: R37.1 U2.43 U6.6 | length 674.2
  Top Layer w10: 2295,2105 2295,2095 ; U6.6 2340,1940 2330,1950 R37.1 2295,2030 2295,2095 ; v1(2380,2290) 2295,2205 2295,2095 ; v1(2380,2405) 2398.43,2386.57 U2.43
  Bottom Layer w10: v1(2380,2290) v1(2380,2405)
SDA: R36.1 U2.44 U6.5 | length 723.6
  Top Layer w10: v1(2325,2385) 2340,2370 2360,2370 2363.11,2366.89 U2.44 ; R36.1@2330,2075 R36.1 ; v1(2380,2240) 2330,2190 R36.1 ; U6.5 2390,1930 2360,1960 2360,2035 R36.1
  Bottom Layer w10: v1(2325,2385) 2345,2365 2345,2275 v1(2380,2240)
TEMP: C4.1 R5.1 U2.97 | length 262.6
  Top Layer w10: U2.97 3182.17,2662.17 C4.1 R5.1
TEST1: pad.0@3300,2530 U2.91 | length 248.6
  Top Layer w10: U2.91 3165.94,2544.06 3180,2530 pad.0@3300,2530
TEST2: pad.1@3205,2150 U2.76 | length 209.2
  Top Layer w10: U2.76 3141.22,2248.78 3205,2185 pad.1@3205,2150
TXD0: J13.3 U2.3 | length 211.1
  Top Layer w10: U2.3 2956.85,2931.85 2965,2940 J13.3
TXD_EXP: R16.1 U2.64 | length 239.8
  Top Layer w10: U2.64 2779.68,2120.32 2800,2100 2815,2100 2830,2085 2830,2020 R16.1
TXD_LED: LD1.K U4.23 | length 389.2
  Top Layer w10: LD1.K 1710,2480 1730,2500 1770,2500 1805,2535 1805,2670 1790,2685 1735.59,2685 U4.23
TXD_USB: R11.1 U2.46 U4.5 | length 1018.2
  Top Layer w10: U4.5 1925,2660 1910,2645 1910,2315 1955,2270 2065,2270 R11.1 2230,2300 2257.52,2327.52 2358.44,2327.52 U2.46
USB_DM: U4.16 USB2.2 | length 841.9
  Top Layer w10: USB2.2 1100,2711.57 1100,2795 1115,2810 1400,2810 1475,2885 1665,2885 1685.28,2864.72 U4.16
USB_DP: U4.15 USB2.3 | length 1108.5
  Top Layer w10: USB2.3 1224.41,2600 1120,2600 1080,2640 1080,2805 1105,2830 1375,2830 1450,2905 1675,2905 1689.68,2890.32 U4.15
USB_VCC: R6.1 U4.20 USB2.1 | length 653.5
  Top Layer w10: USB2.1 1205,2705 1420,2705 R6.1 1530,2745 1630,2745 1647.36,2762.36 U4.20
pads on no net: D3.NC D12.NC U1.1 U1.2 U1.3 U2.1 U2.4 U2.8 U2.9 U2.12 U2.13 U2.14 U2.15 U2.16 U2.18 U2.23 U2.26 U2.27 U2.28 U2.29 U2.35 U2.36 U2.37 U2.41 U2.42 U2.47 U2.48 U2.49 U2.50 U2.54 U2.55 U2.56 U2.57 U2.58 U2.59 U2.60 U2.65 U2.66 U2.67 U2.68 U2.69 U2.70 U2.71 U2.72 U2.73 U2.74 U2.75 U2.77 U2.78 U2.79 U2.83 U2.84 U2.85 U2.86 U2.87 U2.88 U2.89 U2.90 U2.92 U2.93 U2.94 U2.95 U3.ADJ U4.2 U4.3 U4.6 U4.8 U4.9 U4.10 U4.11 U4.12 U4.13 U4.14 U4.24 U4.27 U4.28 U6.3 U6.7

## Polygon pours and split planes (outlines as drawn)
+5 on Top Layer "+5" (solid, remove dead copper, pour order 1002): 3035.59,2760 3035,2760.59 2484.41,2760.59 2484.41,2209.41 3035.59,2209.41
12V_MOTOR on Top Layer "+12V_MOTOR" (solid, remove dead copper, pour order 1001): 3890,1935 3890,2040 3930,2080 4085,2080 4160,2155 4160,3340 4060,3340 4060,3785 1590,3785 1590,4100 4475,4100 4475,1935
GND on Bottom Layer "GND" (solid, remove dead copper, pour order 1003): 4475,1000 4475,4100 1000,4100 1000,1000

## Keep-outs
Keep-Out Layer:
  the board outline again, w10

## Silkscreen, mask and mechanical layers (free items; w line width, h text height)
Top Overlay:
  rectangle: 1875,1005 2795,1175
  text "+" at 1785,3580 h60
  text "+" at 2235,3580 h60
  text "+" at 2685,3580 h60
  text "+" at 3135,3580 h60
  text "+" at 3585,3580 h60
  text "+" at 4035,3580 h60
  text "-" at 1420,3575 h60
  text "-" at 1870,3575 h60
  text "-" at 2320,3575 h60
  text "-" at 2770,3575 h60
  text "-" at 3220,3575 h60
  text "-" at 3670,3575 h60
  text "Motor" at 4035,3035 h60
  text "1" at 2195,2950 h75
  text "Control" at 4035,2945 h60
  text "-" at 3950,2920 h60 r270
  text "+" at 3955,2555 h60 r270
  text "-" at 3950,2470 h60 r270
  text "+" at 3955,2105 h60 r270
  text "+5" at 1770,1305 h75
  text "SN:" at 1690,1030 h75
Mechanical 1:
  lines w10: 1015,1000 1000,1000 ; 1000,1000 1000,4100 4100,4100 4475,4100 4475,1000 1000,1000
Mechanical 3:
  lines w10: 1000,3657.48 1000,3854.33